# Altium PCB FPC_KEY.PcbDoc
Units mil, origin at the board's own origin, x right, y up, seen from the top; angles counter-clockwise.
Board outline 499.08 x 976.38 mil, 2 copper layers (Top Layer, Bottom Layer), stack 3.76 mil thick; 4 components, 8 nets, 18 pads, 12 vias.
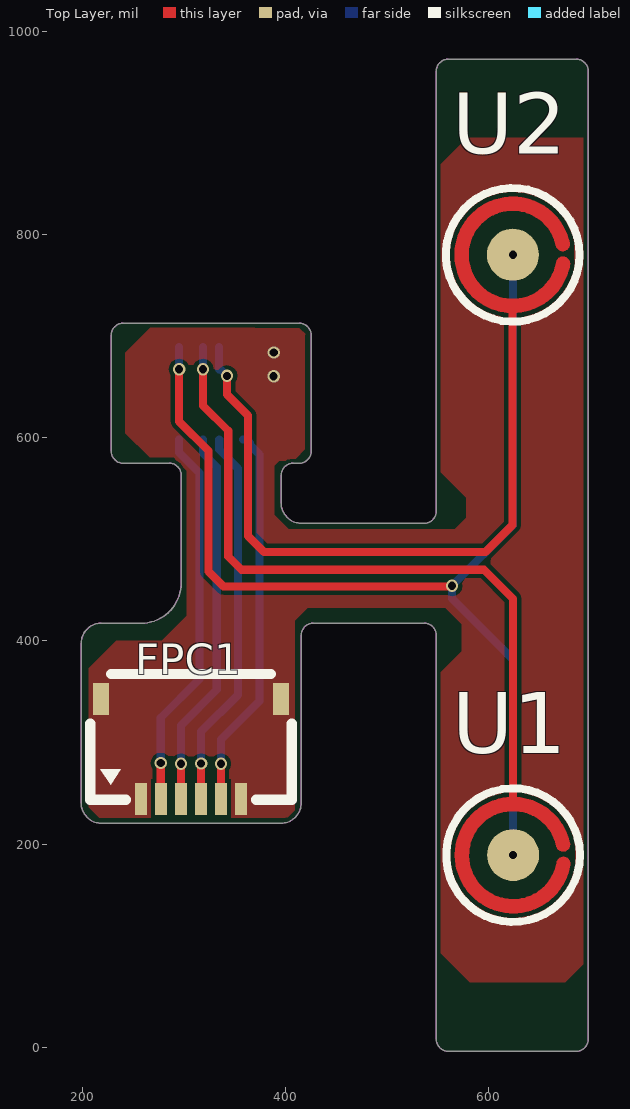
[diagram p0: Top Layer view]
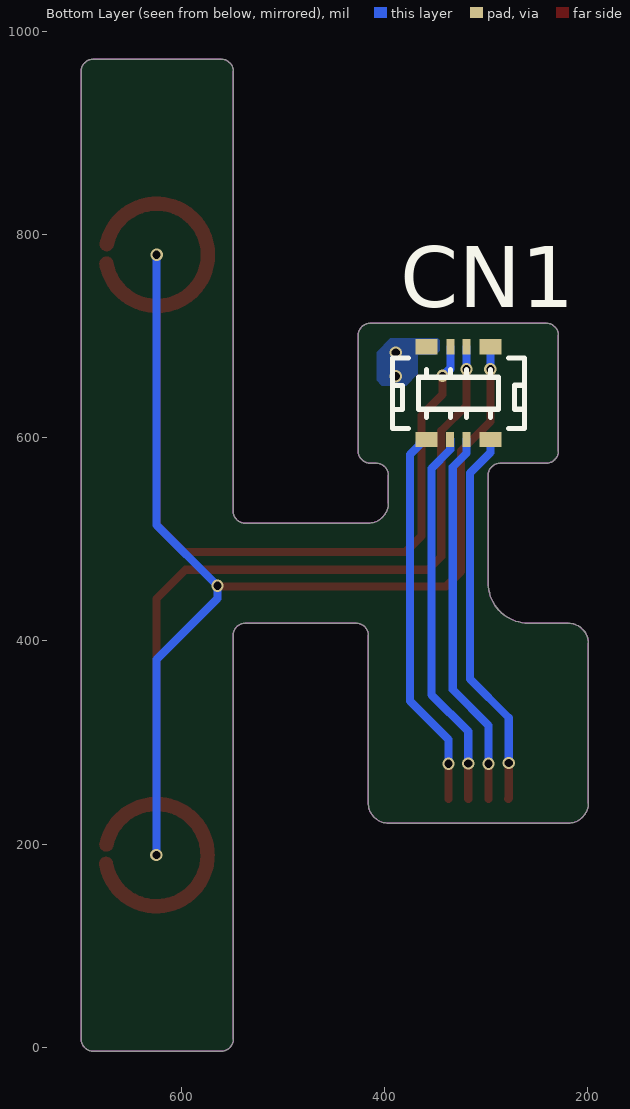
[diagram p1: Bottom Layer view, seen from below]
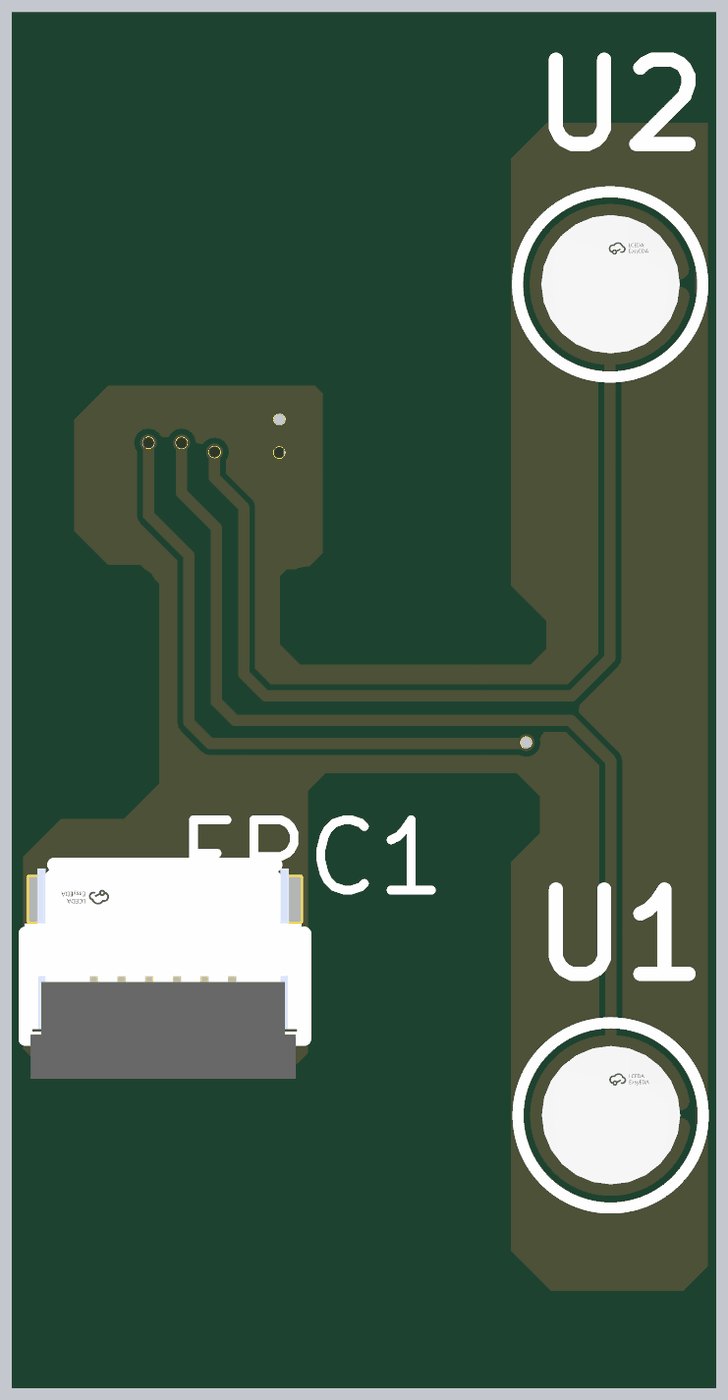
[diagram p2: 3D render of the assembled board from above, using the file's embedded part models]

## Layer stack, top to bottom
Board Layer Stack Top Coverlay 1: solder mask 0.472, Polyimide, Dk 3.4
Top Layer: signal copper 1.38
Dielectric 1: core 1, PI, Dk 4.2
Bottom Layer: signal copper 1.38
Board Layer Stack Bottom Coverlay 1: solder mask 0.472, Polyimide, Dk 3.4

## Board outline
199.13,397.69 cw(c218.81,397.69) 218.81,417.37 258.18,417.37 ccw(c258.18,456.74) 297.55,456.74 297.55,563.04 ccw(c285.74,563.04) 285.74,574.85 240.47,574.85 cw(c240.47,586.66) 228.66,586.66 228.66,700.84 cw(c240.47,700.84) 240.47,712.65 413.7,712.65 cw(c413.7,700.84) 425.51,700.84 425.51,586.66 cw(c413.7,586.66) 413.7,574.85 407.79,574.85 ccw(c407.79,563.04) 395.98,563.04 395.98,535.48 ccw(c415.66,535.48) 415.66,515.8 536.79,515.8 ccw(c536.79,527.61) 548.61,527.61 548.61,960.68 cw(c560.42,960.68) 560.42,972.49 686.4,972.49 cw(c686.4,960.68) 698.21,960.68 698.21,7.92 cw(c686.4,7.92) 686.4,-3.89 560.42,-3.89 cw(c560.42,7.92) 548.61,7.92 548.61,405.56 ccw(c536.79,405.56) 536.79,417.37 427.48,417.37 ccw(c427.48,405.56) 415.66,405.56 415.66,240.21 cw(c395.98,240.21) 395.98,220.52 218.81,220.52 cw(c218.81,240.21) 199.13,240.21

## Design rules (kind name [scope] priority, off if disabled: settings)
Clearance [All] p1: gap=4 ignorepadtopadclearanceinfootprint=TRUE
ComponentClearance [All] p1: gap=0 collisioncheckmode=3 verticalgap=0 showdistances=FALSE
HoleToHoleClearance [All] p1: gap=9 allowstackedmicrovias=TRUE
MinimumSolderMaskSliver [All] p1: minsoldermaskwidth=0
PlaneClearance [All] p1: clearance=10
PolygonConnect [All] p1: connectstyle=Direct reliefconductorwidth=10 reliefentries=4 polygonreliefangle="90 Angle" airgapwidth=10
RoutingVias [All] p1: holewidth=10 width=16 viastyle="Through Hole" minholewidth=4 minwidth=8 maxholewidth=28 maxwidth=50
SilkToSilkClearance [All] p1: silktosilkclearance=0
SilkToSolderMaskClearance [IsPad] p1: minsilkscreentomaskgap=0 clearancetoexposedcopper=TRUE
SolderMaskExpansion [All] p1: expansion=4 istentingtop=FALSE
Width [All] p1: maxlimit=30 minlimit=3.5 preferedwidth=6
24 further rules are at their usual default settings.

## Components (designator, comment, footprint, x,y, rotation, side; value= is the part's Value field where it differs from the comment)
CN1 "5050060812" CONN-SMD_5050060810 393.49,606 r180 bottom
FPC1 "0.5K-HX-6PWB" FPC-SMD_6P-P0.50_HDGC_0.5K-HX-6PWB 410.97,372.44 r180 top
U1 "600-A05S-060" SW-SMD_BD2.50-600-A05S-060 556.54,127 r0 top
U2 "600-A05S-060" SW-SMD_BD2.50-600-A05S-060 556.2,717.89 r0 top

## Footprints (in the part's own frame and the unit in brackets; to place one, negate y for a bottom-side part, rotate by r counter-clockwise, add the part's x,y. Pads: shape width x height; smd on the part's side, far side on the other; paste and mask are expansions set on the pad)
CONN-SMD_5050060810 [mm]
  rect 0.55x0.38 smd paste+0 mask+0.051: 1(0.888,-0.202) 2(0.888,2.118) 7(2.488,-0.202) 8(2.488,2.118)
  rect 0.2x0.38 smd paste+0 mask+0.051: 3(1.486,-0.202) 4(1.488,2.118) 5(1.888,-0.202) 6(1.888,2.118)
  silkscreen extent 0.04,0.08 3.34,1.84, body extent 0.05,-0.21 3.35,2.11, height 0.68
FPC-SMD_6P-P0.50_HDGC_0.5K-HX-6PWB [mm]
  rect 0.3x0.8 smd paste+0 mask+0.05: 1(3.886,3.253) 2(3.386,3.253) 3(2.886,3.253) 4(2.386,3.253) 5(1.886,3.253) 6(1.386,3.253)
  rect 0.4x0.8 smd paste+0 mask+0.05: 7(0.386,0.753) 8(4.886,0.753)
  silkscreen extent 0.12,0.13 5.15,3.27, body extent 0.17,0.19 5.17,3.99, height 1.03
SW-SMD_BD2.50-600-A05S-060 [mm]
  round 1.3 smd paste-100 mask+0.05: 1(1.721,1.579)
  Top Layer region: 353 vertices and 0 holes, not listed, extent 0.266,0.124 3.152,3.029
  silkscreen extent 0.05,-0.09 3.39,3.25, body extent 0.48,0.33 2.97,2.83, height 0.15

## Part data
CN1: library part 5050060812_8pin_DP, JLCPCB Part Class="Extended Part", Manufacturer=MOLEX, Contributor=lcsc, Manufacturer Part=5050060812, spicePre=C, spiceSymbolName=5050060812, Supplier=LCSC, Supplier Part=C779875
FPC1: JLCPCB Part Class="Extended Part", Manufacturer=HDGC(华德共创), Contributor=LCSC, Manufacturer Part=0.5K-HX-6PWB, spicePre=F, spiceSymbolName=0.5K-HX-6PWB, Supplier=LCSC, Supplier Part=C2919491
U1 U2: JLCPCB Part Class="Extended Part", Manufacturer=HYP(鸿源精密), Contributor=lcsc, Manufacturer Part=600-A05S-060, spicePre=U, spiceSymbolName=600-A05S-060, Supplier=LCSC, Supplier Part=C256183

## Via types
v1: diameter 12, hole 8, Top Layer to Bottom Layer, tented both sides, 12 vias

## Nets (pads, with @x,y where several pads share a name; then routed paths per layer and width w, separated by ;. In a path a pad name is that pad's centre, name@x,y a point inside that pad or via, vN(x,y) a via of type N, cw(c..) or ccw(c..) an arc to the next point about the centre after c; other vN are vias at no path point)
CLK: CN1.5 FPC1.3 | length 373.8
  Top Layer w8: FPC1.3 v1(297.37,279.03)
  Bottom Layer w8: v1(297.37,279.03) 297.37,316.8 332.59,352.02 332.59,571.24 319.18,584.65 CN1.5
DOUT: CN1.7 FPC1.2 | length 378.1
  Top Layer w8: v1(277.43,279.74) 277.43,245.07 277.9,244.6 FPC1.2
  Bottom Layer w8: v1(277.43,279.74) 277.43,324.29 315.67,362.53 315.67,565.1 295.55,585.23 CN1.7
GND: CN1.2 FPC1.1 FPC1.6 FPC1.7 FPC1.8
  other v1: 388.58,660.39 388.68,683.95
KEY_1: CN1.6 | length 717.2
  Top Layer w8: v1(319.13,667.28) 319.13,631.45 343.82,606.76 343.82,483.12 356.91,470.03 595.62,470.03 624.26,441.39 624.26,238.41
  Bottom Layer w8: v1(319.13,667.28) 319.13,689.35 CN1.6
KEY_2: CN1.4 | length 692.3
  Top Layer w8: v1(342.57,660.84) 342.57,642.35 363.27,621.66 363.27,503.12 378.94,487.44 597,487.44 623.6,514.05 623.6,729.76
  Bottom Layer w8: CN1.4 334.92,667.33 336.08,667.33 v1(342.57,660.84)
LR: CN1.3 FPC1.4 | length 376.4
  Top Layer w8: FPC1.4 317.22,244.55 v1(317.22,279.15)
  Bottom Layer w8: v1(317.22,279.15) 317.22,310.65 353.47,346.9 353.47,569.81 335.01,588.27 CN1.3
SW2_VDD_3V3: CN1.1 FPC1.5 | length 378.1
  Top Layer w8: FPC1.5 v1(336.74,279.03)
  Bottom Layer w8: v1(336.74,279.03) 336.74,302.76 374.7,340.73 374.7,583.27 365.37,592.6 365.37,594.58 361.89,598.06 CN1.1
VCC_3V3: CN1.8 U1.1 U2.1 | length 1119.7
  Top Layer w8: v1(295.55,667.33) 295.55,615.92 324.37,587.1 324.37,468.39 339.19,453.57 563.49,453.57 v1(564.14,454.23)
  Bottom Layer w8: v1(295.55,667.33) CN1.8 ; v1(623.95,780.05) 623.95,514.03 v1(564.14,454.23) 564.14,441.86 624.29,381.71 v1(624.29,189.17)

## Polygon pours and split planes (outlines as drawn)
GND on Bottom Layer "Bottom Layer-GND" (solid, remove dead copper, pour order 0): 353.38,681.61 353.57,681.41 366.77,681.41 366.77,662.74 378.51,651 402.27,651 407.55,656.28 407.55,684.15 394.05,697.64 347.12,697.64 345.46,695.98 345.46,683.76 347.71,681.51
GND on Top Layer "Top Layer-GND" (solid, remove dead copper, pour order 2): 369.84,707.98 413.86,707.9 419.94,701.82 419.35,701.23 419.35,588.55 408.23,577.43 394.15,577.43 388.96,572.24 388.96,524.05 403.34,509.67 567.03,509.67 578.35,520.99 578.35,540.97 549.93,569.39 549.93,865.98 578.93,894.97 693.21,894.97 693.21,81.85 675.57,64.21 581.77,64.21 550.34,95.63 550.34,366.44 573.75,389.85 573.75,416.29 557.55,432.5 421.87,432.5 409.1,419.73 409.1,233.17 401.67,225.74 217,225.74 206.48,236.26 206.48,373.14 233.45,400.11 278.46,400.11 303.12,424.77 303.12,567.44 290.01,580.55 266.54,580.55 242.68,604.41 242.68,683.78 266.88,707.98

## Keep-outs
Keep-Out Layer:
  lines w0.5: 199.16,240.21 ccw(c218.84,240.21) 218.84,220.52 396.01,220.52 ccw(c396.01,240.21) 415.69,240.21 415.69,405.56 cw(c427.5,405.56) 427.5,417.37 432.73,417.37 441.9,417.37 458.95,417.37 473.17,417.37 512.25,417.37 526.98,417.37 536.82,417.37 cw(c536.82,405.56) 548.63,405.56 548.63,7.92 ccw(c560.44,7.92) 560.44,-3.89 686.43,-3.89 ccw(c686.43,7.92) 698.24,7.92 698.24,960.68 ccw(c686.43,960.68) 686.43,972.49 560.44,972.49 ccw(c560.44,960.68) 548.63,960.68 548.63,527.61 cw(c536.82,527.61) 536.82,515.8 526.98,515.8 512.25,515.8 473.17,515.8 458.95,515.8 441.9,515.8 432.73,515.8 415.69,515.8 cw(c415.69,535.48) 396.01,535.48 396.01,563.04 cw(c407.82,563.04) 407.82,574.85 413.72,574.85 ccw(c413.72,586.66) 425.53,586.66 425.53,700.84 ccw(c413.72,700.84) 413.72,712.65 240.5,712.65 ccw(c240.5,700.84) 228.68,700.84 228.68,586.66 ccw(c240.5,586.66) 240.5,574.85 285.77,574.85 cw(c285.77,563.04) 297.58,563.04 297.58,456.74 cw(c258.21,456.74) 258.21,417.37 218.84,417.37 ccw(c218.84,397.69) 199.16,397.69 199.16,240.21

## Other copper
Top Layer:
  pour cut-out: 681.61,784.82 681.61,776.06 684.15,773.51 684.15,788.4 681.77,786.01
  pour cut-out: 681.92,193.48 681.92,184.7 684.74,181.88 684.85,181.88 684.85,198.2 684.55,198.51 682,195.96 682,193.56

## Silkscreen, mask and mechanical layers (free items; w line width, h text height)
Mechanical 1:
  region: 691.04,971.8 694.95,969.19 697.56,965.28 698.47,960.67 698.24,405.55 698.24,7.92 698.47,7.92 697.56,3.31 694.95,-0.6 691.04,-3.21 686.43,-4.13 560.45,-3.9 560.45,-4.13 555.84,-3.21 551.93,-0.6 549.32,3.31 548.41,7.92 548.64,960.67 548.41,960.67 549.32,965.28 551.93,969.19 555.84,971.8 560.45,972.71 686.43,972.48 686.43,972.71
  region: 403.71,416.18 410.23,411.83 414.58,405.32 416.1,397.64 415.72,240.15 416.1,240.15 414.58,232.47 410.23,225.96 403.71,221.61 396.03,220.08 218.87,220.47 218.87,220.08 211.19,221.61 204.68,225.96 200.33,232.47 198.8,240.15 199.18,396.13 198.8,396.13 200.33,403.81 204.68,410.32 211.19,414.67 218.7,416.17 396.03,417.32 396.03,417.71
  lines w0.5: -2157.39,-4092.86 -2157.39,-4075.81 -2157.39,-4066.64 ; 199.14,240.22 ccw(c218.82,240.22) 218.82,220.54 395.99,220.54 ccw(c395.99,240.22) 415.67,240.22 415.67,405.58 cw(c427.48,405.58) 427.48,417.39 432.71,417.39 441.88,417.39 458.93,417.39 473.15,417.39 512.23,417.39 526.96,417.39 536.8,417.39 cw(c536.8,405.58) 548.61,405.58 548.61,7.94 ccw(c560.43,7.94) 560.43,-3.87 686.41,-3.87 ccw(c686.41,7.94) 698.22,7.94 698.22,960.7 ccw(c686.41,960.7) 686.41,972.51 560.43,972.51 ccw(c560.43,960.7) 548.61,960.7 548.61,527.62 cw(c536.8,527.62) 536.8,515.81 526.96,515.81 512.23,515.81 473.15,515.81 458.93,515.81 441.88,515.81 432.71,515.81 415.67,515.81 cw(c415.67,535.5) 395.99,535.5 395.99,563.06 cw(c407.8,563.06) 407.8,574.87 413.7,574.87 ccw(c413.7,586.68) 425.52,586.68 425.52,700.85 ccw(c413.7,700.85) 413.7,712.66 240.48,712.66 ccw(c240.48,700.85) 228.67,700.85 228.67,586.68 ccw(c240.48,586.68) 240.48,574.87 285.75,574.87 cw(c285.75,563.06) 297.56,563.06 297.56,456.76 cw(c258.19,456.76) 258.19,417.39 218.82,417.39 ccw(c218.82,397.7) 199.14,397.7 199.14,240.22
  text "bottom   / reinforced material:  stainless steel 0.2mm" at 798.96,241.7 h15
Mechanical 2:
  region: 418.5,711.78 422.4,709.17 425.01,705.27 425.93,700.66 425.7,700.66 425.93,586.48 425.01,581.88 422.4,577.97 418.5,575.36 413.89,574.44 413.89,574.67 407.98,574.67 240.66,574.44 236.05,575.36 232.14,577.97 229.53,581.88 228.62,586.48 228.85,586.48 228.62,700.66 229.53,705.27 232.14,709.17 236.05,711.78 240.66,712.7 240.66,712.47 413.89,712.7
  text "top   / reinforced material: stainless steel / 0.2mm" at -391.23,616.78 h15
Mechanical 5:
  drawing of 983 lines, arcs and shapes, not listed
Mechanical 6:
  drawing of 770 lines, arcs and shapes, not listed